# EAGLE board noisa (EAGLE 7.2.0)
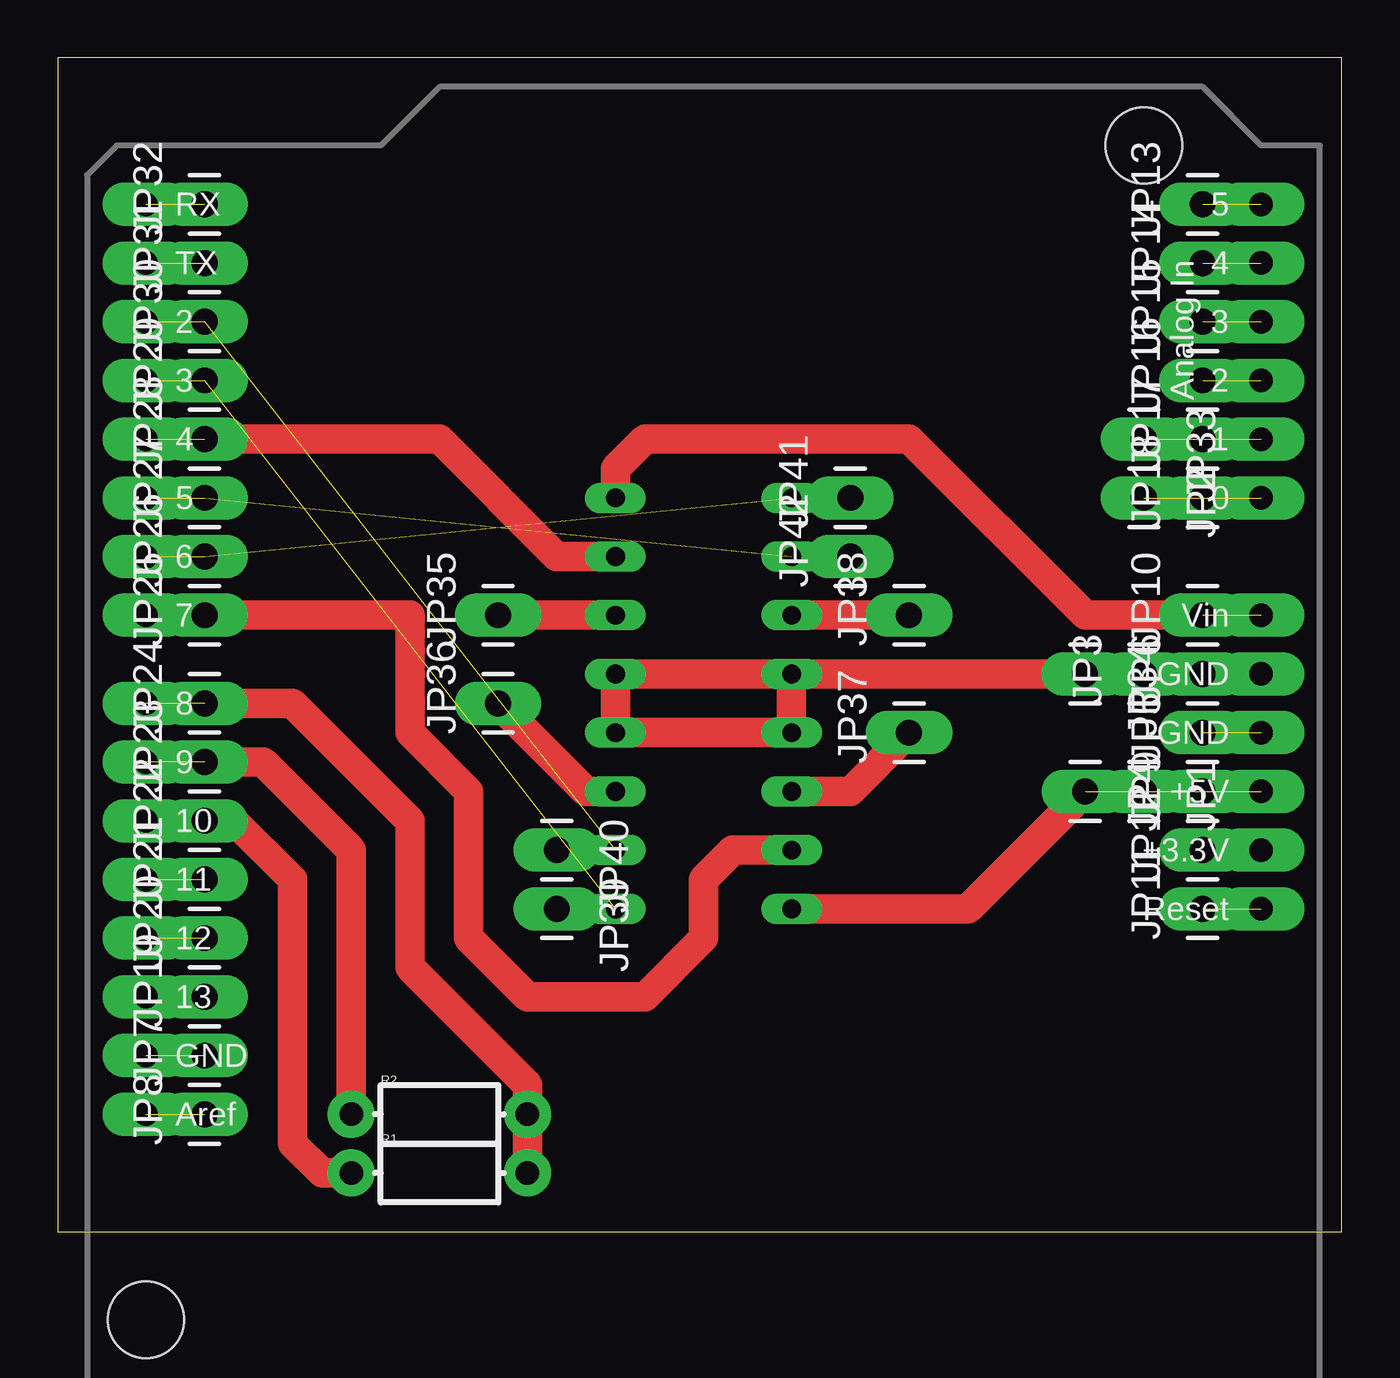
[diagram p0: board, top side]
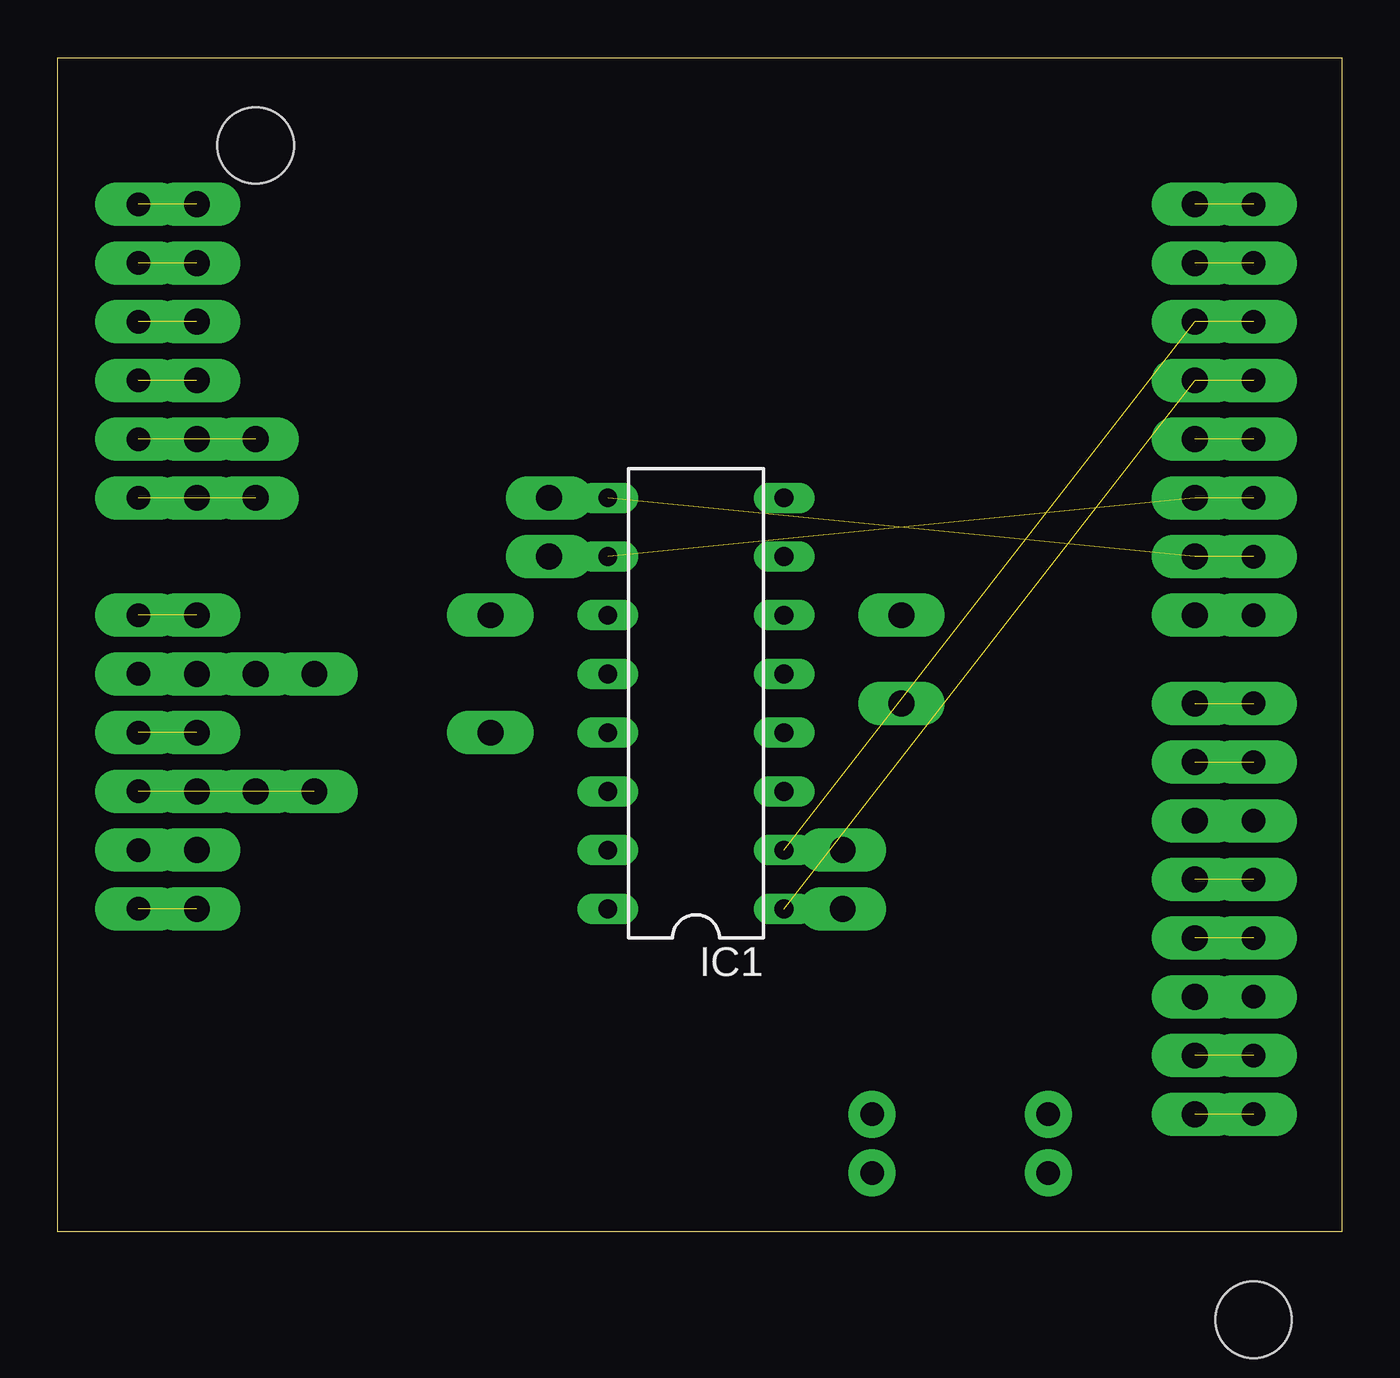
[diagram p1: board, bottom side, seen from below]

Size 55.55 x 50.79 mm. Coordinates in mm from the lower left corner, seen from the top.
Outline: 0,0 55.55,0 55.55,50.79 0,50.79 0,0
Copper layers (1*16): Top 0.035mm / dielectric 1.5mm / Bottom 0.035mm
Design rules "default": minimum track width 10mil, minimum drill 24mil, track to track 8mil, track to pad 8mil, pad to pad 8mil, via to via 8mil, smd to smd 8mil, copper to edge 40mil, drill to drill 8mil, minimum pad ring 10mil, minimum via ring 8mil, stop-mask expansion 4mil, vias tented up to drill 0mil, thermal gap 10mil

## Footprints (pad centres in the part's own frame; a part is rotated, then mirrored left to right if it is on the bottom)
DIL16 = drill 0.813 long: 1 -8.89,-3.81; 2 -6.35,-3.81; 3 -3.81,-3.81; 4 -1.27,-3.81; 5 1.27,-3.81; 6 3.81,-3.81; 7 6.35,-3.81; 8 8.89,-3.81; 9 8.89,3.81; 10 6.35,3.81; 11 3.81,3.81; 12 1.27,3.81; 13 -1.27,3.81; 14 -3.81,3.81; 15 -6.35,3.81; 16 -8.89,3.81
1X01_LONGPAD = drill 1.118 pad 1.88 long: 1 0,0
AXIAL-0.3-KIT = drill 1.016 pad 2.032: P$1 -3.81,0; P$2 3.81,0
DUEMILANOVE_SHIELD_LONGPADS = drill 1.016 pad 1.88 long: 3.3V 50.8,26.67; 5V 50.8,29.21; A0 50.8,41.91; A1 50.8,44.45; A2 50.8,46.99; A3 50.8,49.53; A4 50.8,52.07; A5 50.8,54.61; AREF 2.54,15.24; D2 2.54,49.53; D3 2.54,46.99; D4 2.54,44.45; D5 2.54,41.91; D6 2.54,39.37; D7 2.54,36.83; D8 2.54,33.02; D9 2.54,30.48; D10 2.54,27.94; D11 2.54,25.4; D12 2.54,22.86; D13 2.54,20.32; GND@0 50.8,31.75; GND@1 50.8,34.29; GND@2 2.54,17.78; RES 50.8,24.13; RX 2.54,54.61; TX 2.54,52.07; VIN 50.8,36.83 | hole 3.302: 45.72,57.15; 2.54,6.35

## Placement (x,y rotation side)
IC1  L293D  [DIL16]  27.94,22.86 90 bottom
JP1  M01PTH_LONGPAD  [1X01_LONGPAD]  46.99,19.05 270 top
JP2  M01PTH_LONGPAD  [1X01_LONGPAD]  46.99,31.75 270 top
JP3  M01PTH_LONGPAD  [1X01_LONGPAD]  46.99,24.13 90 top
JP4  M01PTH_LONGPAD  [1X01_LONGPAD]  44.45,19.05 270 top
JP5  M01PTH_LONGPAD  [1X01_LONGPAD]  49.53,21.59 90 top
JP6  M01PTH_LONGPAD  [1X01_LONGPAD]  49.53,24.13 90 top
JP7  M01PTH_LONGPAD  [1X01_LONGPAD]  6.35,7.62 90 top
JP8  M01PTH_LONGPAD  [1X01_LONGPAD]  6.35,5.08 90 top
JP9  M01PTH_LONGPAD  [1X01_LONGPAD]  49.53,19.05 90 top
JP10  M01PTH_LONGPAD  [1X01_LONGPAD]  49.53,26.67 90 top
JP11  M01PTH_LONGPAD  [1X01_LONGPAD]  49.53,13.97 90 top
JP12  M01PTH_LONGPAD  [1X01_LONGPAD]  49.53,16.51 90 top
JP13  M01PTH_LONGPAD  [1X01_LONGPAD]  49.53,44.45 90 top
JP14  M01PTH_LONGPAD  [1X01_LONGPAD]  49.53,41.91 90 top
JP15  M01PTH_LONGPAD  [1X01_LONGPAD]  49.53,39.37 90 top
JP16  M01PTH_LONGPAD  [1X01_LONGPAD]  49.53,36.83 90 top
JP17  M01PTH_LONGPAD  [1X01_LONGPAD]  49.53,34.29 90 top
JP18  M01PTH_LONGPAD  [1X01_LONGPAD]  49.53,31.75 90 top
JP19  M01PTH_LONGPAD  [1X01_LONGPAD]  6.35,10.16 90 top
JP20  M01PTH_LONGPAD  [1X01_LONGPAD]  6.35,12.7 90 top
JP21  M01PTH_LONGPAD  [1X01_LONGPAD]  6.35,15.24 90 top
JP22  M01PTH_LONGPAD  [1X01_LONGPAD]  6.35,17.78 90 top
JP23  M01PTH_LONGPAD  [1X01_LONGPAD]  6.35,20.32 90 top
JP24  M01PTH_LONGPAD  [1X01_LONGPAD]  6.35,22.86 90 top
JP25  M01PTH_LONGPAD  [1X01_LONGPAD]  6.35,26.67 90 top
JP26  M01PTH_LONGPAD  [1X01_LONGPAD]  6.35,29.21 90 top
JP27  M01PTH_LONGPAD  [1X01_LONGPAD]  6.35,31.75 90 top
JP28  M01PTH_LONGPAD  [1X01_LONGPAD]  6.35,34.29 90 top
JP29  M01PTH_LONGPAD  [1X01_LONGPAD]  6.35,36.83 90 top
JP30  M01PTH_LONGPAD  [1X01_LONGPAD]  6.35,39.37 90 top
JP31  M01PTH_LONGPAD  [1X01_LONGPAD]  6.35,41.91 90 top
JP32  M01PTH_LONGPAD  [1X01_LONGPAD]  6.35,44.45 90 top
JP33  M01PTH_LONGPAD  [1X01_LONGPAD]  46.99,34.29 270 top
JP34  M01PTH_LONGPAD  [1X01_LONGPAD]  44.45,24.13 270 top
JP35  M01PTH_LONGPAD  [1X01_LONGPAD]  19.05,26.67 90 top
JP36  M01PTH_LONGPAD  [1X01_LONGPAD]  19.05,22.86 90 top
JP37  M01PTH_LONGPAD  [1X01_LONGPAD]  36.83,21.59 90 top
JP38  M01PTH_LONGPAD  [1X01_LONGPAD]  36.83,26.67 90 top
JP39  M01PTH_LONGPAD  [1X01_LONGPAD]  21.59,13.97 270 top
JP40  M01PTH_LONGPAD  [1X01_LONGPAD]  21.59,16.51 270 top
JP41  M01PTH_LONGPAD  [1X01_LONGPAD]  34.29,31.75 90 top
JP42  M01PTH_LONGPAD  [1X01_LONGPAD]  34.29,29.21 90 top
R1  [AXIAL-0.3-KIT]  16.51,2.54 0 top
R2  [AXIAL-0.3-KIT]  16.51,5.08 0 top
U1  ARDUINO_SHIELDLONGPADS  [DUEMILANOVE_SHIELD_LONGPADS]  1.27,-10.16 0 top

## Library data of the parts
IC1 = st-microelectronics; MPN: L293D; OC_FARNELL: 9589619; OC_NEWARK: 56P8249
JP1-JP42 = SparkFun-Connectors
R1 R2 = SparkFun-Passives
U1 = SparkFun-Boards

## Nets
N$1: JP5.1 U1.GND@0
N$2: IC1.8 JP10.1 U1.VIN
N$3: IC1.16 JP1.1 JP4.1 JP9.1 U1.5V
N$4: IC1.1 JP29.1 JP39.1 U1.D3
N$5: IC1.7 JP28.1 U1.D4
N$6: IC1.2 JP30.1 JP40.1 U1.D2
N$7: IC1.9 JP26.1 JP41.1 U1.D6
N$8: IC1.10 JP27.1 JP42.1 U1.D5
N$9: IC1.15 JP25.1 U1.D7
N$10: IC1.3 JP36.1
N$11: IC1.6 JP35.1
N$12: IC1.14 JP37.1
N$13: IC1.11 JP38.1
N$14: JP2.1 JP18.1 U1.A0
N$15: JP17.1 JP33.1 U1.A1
N$16: IC1.4 IC1.5 IC1.12 IC1.13 JP3.1 JP6.1 JP34.1 U1.GND@1
N$17: JP7.1 U1.GND@2
N$18: JP8.1 U1.AREF
N$19: U1.3.3V
N$20: JP11.1 U1.RES
N$21: JP12.1
N$22: JP13.1 U1.A5
N$23: JP14.1 U1.A4
N$24: JP15.1 U1.A3
N$25: JP16.1 U1.A2
N$26: JP19.1 U1.D13
N$27: JP20.1 U1.D12
N$28: JP21.1 U1.D11
N$29: JP22.1 R1.P$1 U1.D10
N$30: JP23.1 R2.P$1 U1.D9
N$31: JP24.1 R1.P$2 R2.P$2 U1.D8
N$32: JP31.1 U1.TX
N$33: JP32.1 U1.RX

## Tracks (layer width: path | path; a pad name or v marks a point on that pad's centre or on a via)
N$1  (1 unrouted)
N$2  (1 unrouted)
  Top 1.27: JP10.1 44.45,26.67 36.83,34.29 25.4,34.29 24.13,33.02 IC1.8
N$3  (3 unrouted)
  Top 1.27: JP4.1 39.37,13.97 IC1.16
N$4  (2 unrouted)
  Top 1.27: IC1.1 JP39.1
N$5  (1 unrouted)
  Top 1.27: JP28.1 16.51,34.29 21.59,29.21 IC1.7
N$6  (2 unrouted)
  Top 1.27: IC1.2 JP40.1
N$7  (2 unrouted)
  Top 1.27: JP41.1 IC1.9
N$8  (2 unrouted)
  Top 1.27: IC1.10 JP42.1
N$9
  Top 1.27: IC1.15 29.21,16.51 27.94,15.24 27.94,12.7 25.4,10.16 20.32,10.16 17.78,12.7 17.78,19.05 15.24,21.59 15.24,26.67 JP25.1 U1.D7
N$10
  Top 1.27: JP36.1 21.59,20.32 22.86,19.05 IC1.3
N$11
  Top 1.27: JP35.1 IC1.6
N$12
  Top 1.27: JP37.1 34.29,19.05 IC1.14
N$13
  Top 1.27: IC1.11 JP38.1
N$14  (2 unrouted)
N$15  (2 unrouted)
N$16
  Top 1.27: IC1.12 IC1.13 IC1.4 IC1.5 IC1.12 | IC1.12 JP34.1 JP3.1 JP6.1 U1.GND@1
N$17  (1 unrouted)
N$18  (1 unrouted)
N$20  (1 unrouted)
N$22  (1 unrouted)
N$23  (1 unrouted)
N$24  (1 unrouted)
N$25  (1 unrouted)
N$26
  Top 1.27: JP19.1 U1.D13
N$27  (1 unrouted)
N$28  (1 unrouted)
N$29
  Top 1.27: U1.D10 JP22.1 7.62,17.78 10.16,15.24 10.16,3.81 11.43,2.54 R1.P$1
N$30  (1 unrouted)
  Top 1.27: JP23.1 8.89,20.32 12.7,16.51 R2.P$1
N$31  (1 unrouted)
  Top 1.27: JP24.1 10.16,22.86 15.24,17.78 15.24,11.43 20.32,6.35 R2.P$2 R1.P$2
N$32  (1 unrouted)
N$33  (1 unrouted)